# Altium PCB serdes-interface.PcbDoc (part 2 of 3)
Units mm, origin at the board's own origin, x right, y up, seen from the top; angles counter-clockwise.
Board outline 39.62 x 39.62 mm, 6 copper layers (Top Layer, GND1, MidLayer1, VDD_negative, GND2, Bottom Layer); 177 components, 131 nets, 827 pads, 502 vias.
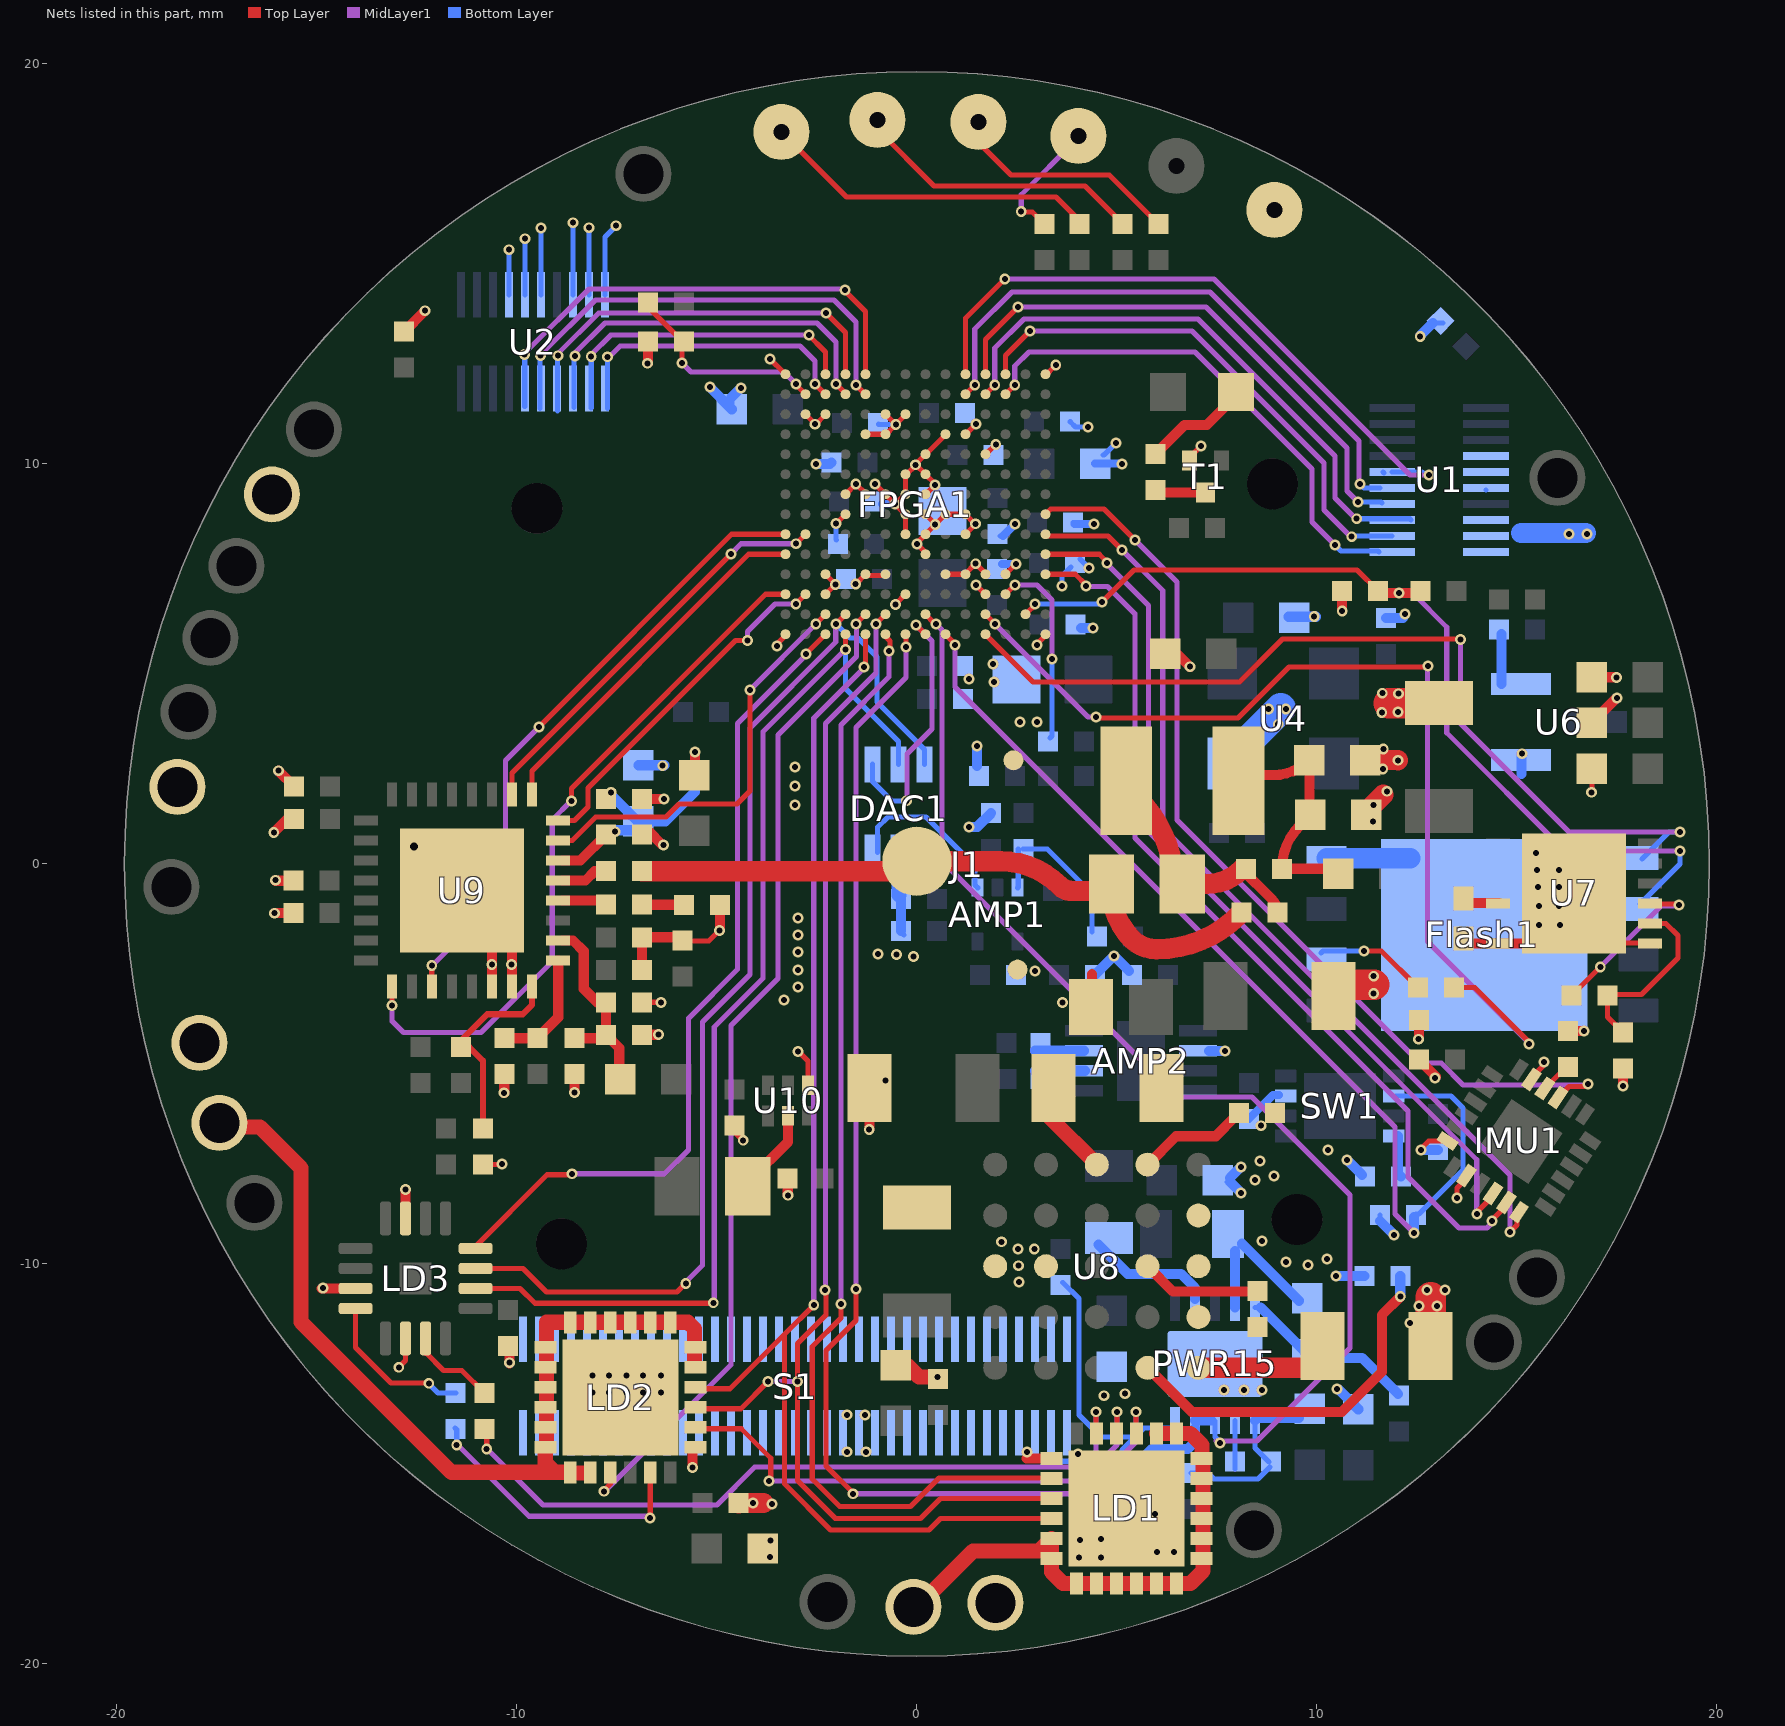
[diagram p6: the nets of this part, all layers, seen from the top]

## Via types
v1: diameter 0.27, hole 0.15, Top Layer to Bottom Layer, tented both sides, 501 vias
v2: diameter 0.5, hole 0.2, Top Layer to Bottom Layer, tented both sides, 1 vias

## Nets (pads, with @x,y where several pads share a name; then routed paths per layer and width w, separated by ;. In a path a pad name is that pad's centre, name@x,y a point inside that pad or via, vN(x,y) a via of type N, cw(c..) or ccw(c..) an arc to the next point about the centre after c; other vN are vias at no path point) (continued)
GND: AMP2.6 C1.1 C2.1 C3.1 C4.1 C5.1 C6.1 C7.1 C8.1 C9.1 C10.1 C11.1 C12.1 C13.1 C14.1 C15.1 C16.1 C17.1 C20.1 C21.1 C22.1 C23.1 C24.1 C25.1 C26.1 C27.1 C28.1 C29.1 C30.1 C31.1 C32.1 C33.1 C34.1 C35.1 C36.1 C37.1 C38.1 C39.1 C40.1 C41.1 C42.1 C43.1 C44.1 C45.2 C46.2 C47.2 C48.2 C50.1 C51.1 C52.1 C53.1 C54.1 C55.1 C56.1 C57.1 C58.1 C59.1 C60.1 C61.1 C62.1 C63.1 C64.1 C66.2 C67.2 C68.2 C70.2 C71.2 C72.2 C73.2 C75.2 C76.2 C77.1 C78.1 DAC1.5 Flash1.4 FPGA1.A1 FPGA1.A14 FPGA1.C2 FPGA1.C3 FPGA1.C6 FPGA1.C7 FPGA1.D5 FPGA1.D6 FPGA1.D9 FPGA1.D10 FPGA1.E8 FPGA1.E11 FPGA1.F7 FPGA1.F8 FPGA1.G4 FPGA1.G5 FPGA1.G6 FPGA1.G7 FPGA1.G8 FPGA1.H4 FPGA1.H7 FPGA1.H8 FPGA1.H9 FPGA1.H10 FPGA1.J7 FPGA1.J8 FPGA1.J10 FPGA1.K8 FPGA1.L3 FPGA1.L5 FPGA1.L6 FPGA1.L9 FPGA1.L10 FPGA1.L11 FPGA1.L12 FPGA1.M3 FPGA1.M7 FPGA1.M11 FPGA1.P1 FPGA1.P14 IMU1.11 IMU1.18 IMU1.20 J1.1 LD1.1 LD1.PAD LD2.1 LD2.PAD LD3.7 LD3.11 LD3.14 PWR15.PAD R3.2 R6.1 R12.1 R17.1 R21.1 R28.2 R30.2 R31.2 R32.2 R36.1 R39.1 R45.2 R46.1 S1.1 S1.2 S1.3 S1.4 S1.5 S1.6 S1.7 S1.8 S1.9 S1.10 S1.11 S1.12 S1.13 S1.14 S1.15 S1.16 S1.17 S1.18 S1.19 S1.20 S1.21 S1.22 S1.23 S1.24 S1.25 S1.26 S1.27 S1.28 S1.29 S1.30 S1.31 S1.32 S1.33 S1.34 S1.35 S1.36 S1.37 S1.38 S1.39 S1.40 S1.41 S1.42 S1.43 S1.44 S1.45 S1.46 S1.47 S1.48 S1.49 S1.50 S1.51 S1.52 S1.53 S1.54 S1.55 S1.56 S1.57 S1.58 S1.59 S1.60 S1.61 S1.62 S1.63 S1.64 S1.65 S1.66 S1.67 S1.68 S1.69 S1.70 SW1.3 T1.2 T_GND1.0 T_GND2.0 T_GND3.0 T_GND4.0 U1.1 U1.2 U1.3 U1.5 U1.6 U1.7 U2.1 U2.2 U2.3 U2.5 U2.6 U2.7 U4.2 U6.1 U7.6 U7.7 U7.13 U8.B5 U8.C1 U8.C2 U8.C5 U8.D5 U9.6 U9.7 U9.33 U10.4 | length 92.9
  Top Layer w0.13: C14.1@-15.743,1.122 C14.1@-15.57,1.122 ; C6.1@-15.587,-0.419 C6.1@-15.583,-0.415 ; v1@-14.884,-10.617 v1@-14.88,-10.613 ; v1@-13.005,-12.636 -12.785,-12.417 LD3.14@-12.785,-11.863 ; R6.1@-10.854,-7.511 v1@-10.356,-7.511 ; U9.33@-10.625,-1.837 U9.33@-10.49,-1.702 ; U9.33@-10.147,-1.943 U9.33@-10.125,-1.965 ; C8.1@-6.872,-3.459 v1@-6.393,-3.459 ; v1@-6.363,0.47 v1(-6.337,0.47) ; C12.1@-5.779,-1.93 -5.207,-1.93 v1@-4.922,-1.645 ; C4.1@-4.716,-6.558 v1@-4.369,-6.905 ; v1@-3.7,12.65 -3.697,12.65 FPGA1.A1@-3.288,12.242 ; v1@-3.5,5.5 -3.288,5.712 FPGA1.P1@-3.288,5.742 ; v1@-2.997,-4.648 -2.721,-4.924 U10.4@-2.721,-5.529 ; FPGA1.C2@-2.788,11.242 -2.554,11.007 v1@-2.535,11.007 ; v1(-2.548,10.992) -2.535,10.992 -2.532,10.989 -2.291,11.23 FPGA1.C3@-2.291,11.25 ; FPGA1.M3@-2.288,6.742 v1@-2.038,6.992 ; FPGA1.L3@-2.288,7.242 v1@-2.038,6.992 ; v1@-2.032,8.486 -2.032,8.498 v1@-2.022,8.507 ; v1@-2.023,7.011 -2.023,7.007 v1@-2.038,6.992 ; v1@-2.009,6.978 -2.024,6.978 v1@-2.038,6.992 ; v1@-2,8.525 -2.005,8.525 FPGA1.H4@-1.788,8.742 ; FPGA1.G4@-1.788,9.229 -1.788,9.239 v1(-1.53,9.497) FPGA1.G5@-1.278,9.245 ; v1@-1.572,6.989 -1.541,6.989 FPGA1.L5@-1.288,7.242 -1.258,7.212 -0.783,7.212 FPGA1.L6@-0.778,7.207 ; FPGA1.D5@-1.288,10.742 FPGA1.D6@-0.788,10.742 ; v1(-1.194,-6.642) v1@-1.185,-6.633 ; v1(-1.05,9.5) -0.8,9.25 FPGA1.G6@-0.775,9.25 ; FPGA1.D6@-0.824,10.71 -0.803,10.71 v1@-0.532,10.981 ; C54.1@-0.8,-5.423 v1(-0.787,-5.41) ; FPGA1.C6@-0.788,11.242 -0.532,10.985 v1@-0.532,10.981 ; FPGA1.G6@-0.786,9.239 v1@-0.552,9.005 ; v1(-0.54,6.485) -0.54,6.493 FPGA1.M7@-0.273,6.761 ; v1@-0.532,10.951 v1@-0.532,10.981 ; C43.1@-0.526,-12.529 C43.1@-0.247,-12.529 ; v1@-0.518,10.928 -0.518,10.972 -0.53,10.983 v1(-0.529,10.984) -0.273,11.24 FPGA1.C7@-0.273,11.255 ; FPGA1.G7@-0.307,9.241 v1(-0.55,8.998) -0.276,8.724 -0.288,8.712 FPGA1.J7@-0.288,8.242 ; FPGA1.G7@-0.275,9.275 -0.288,9.288 FPGA1.F7@-0.288,9.742 -0.258,9.742 v1@-0.038,9.962 ; v1@-0.055,9.975 FPGA1.E8@0.212,10.242 ; v1@-0.025,9.975 FPGA1.F8@0.212,9.742 0.215,9.735 FPGA1.F8@0.217,9.736 ; FPGA1.G8@0.175,9.25 0.225,9.25 v1(0.45,9.475) 0.45,9.503 FPGA1.F8@0.217,9.736 ; FPGA1.H8@0.212,8.741 0.463,8.49 0.714,8.741 FPGA1.H9@0.726,8.741 ; FPGA1.G8@0.212,9.242 0.212,9.238 FPGA1.G8@0.225,9.225 ; FPGA1.F8@0.212,9.742 FPGA1.F8@0.217,9.736 ; FPGA1.G8@0.22,9.19 FPGA1.G8@0.22,9.22 ; FPGA1.K8@0.225,7.75 0.225,7.775 v1(0,8) 0,8.025 FPGA1.J8@0.212,8.237 ; FPGA1.J8@0.225,8.25 FPGA1.J8@0.212,8.237 ; FPGA1.J8@0.245,8.22 0.212,8.22 FPGA1.J8@0.212,8.237 ; FPGA1.E8@0.257,10.273 0.714,10.73 FPGA1.D9@0.714,10.751 ; v1@0.453,8.473 0.443,8.473 FPGA1.J8@0.212,8.242 FPGA1.J8@0.212,8.237 ; FPGA1.L9@0.712,7.242 1.185,7.242 FPGA1.L10@1.206,7.22 ; FPGA1.H9@0.712,8.742 1.158,8.742 FPGA1.H10@1.2,8.7 ; FPGA1.D10@1.2,10.75 1.225,10.75 v1(1.475,11) ; FPGA1.L10@1.212,7.242 1.212,7.253 1.467,7.508 1.726,7.249 FPGA1.L11@1.732,7.249 ; FPGA1.L10@1.211,7.251 FPGA1.L10@1.211,7.272 ; FPGA1.J10@1.212,8.242 1.445,8.475 v1@1.45,8.475 ; FPGA1.H10@1.212,8.742 v1@1.428,8.525 ; v1(1.475,6.975) 1.7,6.75 FPGA1.M11@1.725,6.75 ; FPGA1.E11@1.727,10.245 1.73,10.245 v1(1.971,10.486) ; FPGA1.L12@2.212,7.242 2.475,7.505 v1@2.475,7.525 ; 2.725,-14.875 2.738,-14.862 ; v1@3,5.525 3.025,5.525 3.212,5.712 FPGA1.P14@3.212,5.742 ; FPGA1.A14@3.237,12.236 3.429,12.428 3.525,12.428 3.482,12.471 v1(3.47,12.471) ; LD1.1@3.331,-14.831 LD1.1@3.349,-14.849 ; C50.1@4.508,-3.746 C50.1@4.508,-3.594 ; C21.1@6.204,5.253 C21.1@6.497,5.253 ; C53.1@6.401,-5.626 C53.1@6.426,-5.601 ; T1.2@6.814,10.084 6.814,10.164 v1(7.1,10.45) ; C1.1@11.233,1.224 cw(c11.419,1.224) C1.1@11.287,1.356 ; v1@12.535,-4.369 v1@12.549,-4.355 ; v1@12.6,-7.125 12.796,-6.929 IMU1.18@13.268,-6.929 ; v1@13.5,-8.4 13.5,-8.1 13.742,-7.858 IMU1.20@13.742,-7.791 ; C57.1@13.665,-2.07 C57.1@13.749,-1.987 ; U7.13@15.245,-1.987 U7.13@15.329,-2.07 ; IMU1.11@15.4,-5.3 15.675,-5.025 v1(15.675,-4.95) ; v1@16.872,1.784 C60.1@16.872,2.383 ; U7.13@17.45,-1.994 17.47,-1.974 U7.7@18.347,-1.974
  Top Layer w0.254: v1(-16.078,0.787) C14.1@-15.743,1.122 ; v1@-16.048,-1.227 C5.1@-15.583,-1.227 ; v1(-16.04,-0.406) -16.04,-0.419 C6.1@-15.587,-0.419 ; v1(-15.964,2.329) C13.1@-15.57,1.935 ; v1@-14.88,-10.613 LD3.11@-14.035,-10.613 ; C40.1@-12.821,13.305 v1@-12.301,13.825 ; LD3.7@-12.785,-8.978 v1@-12.785,-8.208 ; U9.33@-11.197,-0.831 U9.33@-10.408,-1.619 ; U9.6@-10.625,-3.063 U9.33@-10.625,-1.837 ; v1@-10.317,-5.72 C20.1@-10.317,-5.258 ; v1@-10.189,-12.493 C45.2@-10.189,-12.051 ; U9.7@-10.125,-3.063 U9.33@-10.125,-1.965 ; v1@-8.564,-5.678 C9.1@-8.564,-5.258 ; C7.1@-6.872,-4.272 v1@-6.507,-4.272 ; C10.1@-6.872,-2.646 C11.1@-6.872,-1.833 C12.1@-6.096,-1.833 ; C15.1@-6.872,1.621 v1@-6.367,1.621 ; v1@-6.725,12.52 R12.1@-6.725,13.058 ; C16.1@-6.718,0.826 v1@-6.363,0.47 ; v1(-5.613,-15.088) LD2.1@-5.613,-14.63 ; v1@-4.922,-1.645 R3.2@-4.922,-1.033 ; v1@-3.232,-8.268 C3.1@-3.232,-7.806 ; v1@-1.185,-6.633 C54.1@-1.185,-5.601 ; 2.738,-14.862 LD1.1@3.361,-14.862 ; C50.1@4.375,-2.927 4.375,-2.75 ; C21.1@6.497,5.253 v1@6.825,4.925 ; v1@10.625,6.343 R17.1@10.625,6.917 ; C46.2@12.549,-4.894 v1@12.977,-5.323 ; v1@12.549,-4.355 C47.2@12.549,-3.904 ; C57.1@13.749,-1.987 U7.6@14.521,-1.987 U7.13@15.245,-1.987 ; C48.2@16.277,-4.18 v1(16.674,-4.18) ; C58.1@16.872,3.526 v1@17.498,4.152 ; C59.1@16.872,4.669 v1@17.483,4.669 ; v1@17.648,-5.529 R28.2@17.648,-5.111
  Top Layer w0.381: C43.1@-0.247,-12.529 0.051,-12.827 C44.1@0.521,-12.827
  Top Layer w0.508: C42.1@-4.458,-15.981 -4.452,-15.975 -3.837,-15.975 ; C2.1@11.207,2.596 12.022,2.596 v1(12.027,2.591) ; C1.1@11.287,1.356 v1@11.659,1.727
  Top Layer w0.762: C51.1@10.481,-3.023 11.43,-3.023 ; 11.789,4.017 C56.1@13.056,4.017 ; C52.1@12.843,-12.212 12.843,-10.827
  Bottom Layer w0.13: U2.7@-10.201,14.226 v1@-10.201,15.351 ; U2.6@-9.801,14.226 v1@-9.801,15.626 ; U2.5@-9.401,14.226 v1(-9.4,15.9) ; U2.3@-8.601,14.226 v1@-8.601,16.051 ; U2.2@-8.201,14.226 v1@-8.201,15.899 ; U2.1@-7.801,14.226 -7.801,15.674 v1@-7.525,15.95 ; C29.1@-4.629,11.368 C29.1@-4.629,11.671 ; v1(-2.025,8.509) -2.025,8.113 C26.1@-2.01,8.099 ; C23.1@-0.961,10.992 -0.953,10.984 v1(-0.529,10.984) ; C31.1@-0.873,9.002 C31.1@-0.869,8.998 ; C71.2@-0.395,-1.671 -0.395,-1.705 C71.2@-0.325,-1.775 ; R21.1@1.475,2.425 1.5,2.45 ; C64.1@2.075,8.2 C64.1@2.15,8.2 ; 3.625,-14.925 3.633,-14.933 R39.1@4.675,-14.933 ; v1(3.625,6.95) 3.625,7.2 C30.1@3.85,7.425 ; C33.1@3.83,11.055 3.96,10.925 v1@4.25,10.925 ; C35.1@3.907,8.531 C35.1@3.937,8.5 ; C30.1@4.075,7.625 v1(4.3,7.4) ; C75.2@4.375,-2.675 C75.2@4.445,-2.675 ; C34.1@4.65,10.225 4.675,10.225 v1(4.975,10.525) ; v1@4.997,10.55 v1@5,10.55 ; C76.2@5.3,-2.675 C76.2@5.325,-2.675 ; R36.1@5.525,-15.9 R36.1@5.6,-15.9 ; AMP2.6@7.275,-4.7 AMP2.6@7.3,-4.675 ; C68.2@7.75,-7.95 C68.2@7.825,-7.95 ; U4.2@7.887,2.509 U4.2@7.887,2.68 ; C78.1@8.304,-6.38 C78.1@8.304,-6.371 ; v1@9.977,6.18 v1@9.982,6.185 ; R46.1@11.575,-8.925 R46.1@11.575,-8.783 ; v1@12.151,6.147 v1@12.217,6.213 ; Flash1.4@12.33,0.145 Flash1.4@12.375,0.1 ; C39.1@12.898,13.523 C39.1@13.142,13.523
  Bottom Layer w0.203: C31.1@-0.869,8.998 v1(-0.55,8.998) ; C22.1@2.125,7.5 v1(2.475,7.5) ; C64.1@2.15,8.2 v1(2.45,8.5) ; C35.1@3.937,8.5 v1@4.4,8.5 ; C34.1@4.454,10.007 v1@5.143,10.007 ; v1@4.974,10.526 v1@4.997,10.55 ; C78.1@8.304,-6.371 8.9,-5.775 SW1.3@9.05,-5.775
  Bottom Layer w0.254: C17.1@-6.964,2.465 v1@-6.317,2.465 ; v1@-5.175,11.914 C29.1@-4.629,11.368 ; C29.1@-4.629,11.671 v1(-4.4,11.9) ; v1@-2.5,10 -2.173,10 C28.1@-2.133,10.039 ; C71.2@-0.395,-1.671 C70.2@-0.395,-0.871 ; v1(1.3,0.925) 1.508,0.925 C73.2@1.854,1.27 ; 1.5,2.45 v1(1.5,2.95) ; C36.1@4.1,5.9 v1(4.4,5.9) ; C75.2@4.445,-2.779 v1(4.925,-2.3) ; v1(4.925,-2.3) C76.2@5.3,-2.675 ; R36.1@5.6,-15.9 v1(5.95,-16.25) ; AMP2.6@7.3,-4.675 v1(7.7,-4.675) ; C68.2@7.825,-7.95 v1(8.1,-8.225) ; C68.2@7.825,-7.85 v1(8.1,-7.575) ; C37.1@9.29,6.18 v1@9.977,6.18 ; v1(10.473,-10.304) R32.2@11.183,-10.304 ; v1@10.525,-13.125 C66.2@11.032,-13.632 ; v1(10.75,-7.4) R45.2@11.125,-7.775 ; R46.1@11.575,-8.925 v1(11.925,-9.275) ; C38.1@11.73,6.147 v1@12.151,6.147 ; v1@12.575,13.2 C39.1@12.898,13.523 ; v1@12.625,-7.155 C77.1@13.029,-7.155 ; 15.115,2.25 U6.1@15.115,2.741
  Bottom Layer w0.381: C70.2@-0.45,-0.775 DAC1.5@-0.45,0.29
  Bottom Layer w0.508: Flash1.4@10.237,0.145 Flash1.4@12.33,0.145 ; 15.1,8.275 v1@16.725,8.275
  Bottom Layer w0.762: U4.2@7.887,2.68 v1@9.093,3.886
  other v1: 4.053,-17.346 4.603,-17.346 -3.67,-17.323 6,-17.2 6.425,-17.2 -3.658,-16.916 4.075,-16.9 4.6,-16.875 -3.625,-16 -4.1,-15.975 4.025,-14.75 -1.75,-14.698 -1.275,-14.698 2.75,-14.7 -1.75,-13.773 -1.3,-13.775 4.678,-13.296 5.203,-13.246 -8.115,-13.221 -7.696,-13.221 -7.264,-13.221 -6.845,-13.221 -6.401,-13.221 7.675,-13.15 8.175,-13.15 8.625,-13.15 10.5,-13.125 0.513,-12.827 -8.115,-12.789 -7.696,-12.789 -7.264,-12.789 -6.845,-12.789 -6.401,-12.789 -12.954,-12.586 -10.185,-12.471 12.325,-11.475 12.55,-11.05 13,-11.05 12.75,-10.65 13.2,-10.65 -14.846,-10.604 2.553,-10.452 2.54,-10.046 9.775,-10.025 9.225,-9.95 10.25,-9.875 2.527,-9.627 2.934,-9.627 2.11,-9.447 8.625,-9.425 13.5,-8.35 -3.225,-8.284 -12.789,-8.141 8.45,-7.9 8.925,-7.8 -10.376,-7.506 8.575,-7.425 10.275,-7.15 12.6,-7.15 -4.343,-6.909 8.603,-6.546 -10.321,-5.722 -8.559,-5.714 17.65,-5.55 12.95,-5.35 -2.972,-4.686 12.535,-4.381 -6.464,-4.267 3.64,-3.468 -6.401,-3.467 -3.325,-3.4 11.417,-3.238 -2.975,-3.075 11.417,-2.807 2.95,-2.675 -2.975,-2.65 -10.63,-2.515 -10.135,-2.515 -0.085,-2.318 -0.975,-2.25 -0.51,-2.268 -2.975,-2.2 -2.975,-1.775 -4.94,-1.664 15.55,-1.525 16.075,-1.525 -2.975,-1.35 -16.066,-1.232 15.55,-1.05 16.05,-1.05 15.525,-0.575 16.05,-0.575 15.5,-0.15 16.05,-0.15 15.475,0.275 11.405,1.054 -3.05,1.475 11.417,1.473 -6.322,1.623 16.866,1.791 11.747,1.816 -3.05,1.95 11.646,2.375 -3.05,2.425 -6.356,2.456 15.126,2.756 11.659,2.87 9.03,3.492 2.575,3.55 3,3.55 11.62,3.785 12.027,3.797 8.788,3.873 9.22,3.873 17.5,4.15 11.633,4.267 12.04,4.255 1.925,4.55 1.3,4.625 17.488,4.661 6.828,4.929 1.9,5 -3.5,5.45 3,5.475 9.931,6.185 12.201,6.249 10.63,6.325 -2.041,6.983 -1.532,6.997 1.468,7.505 16.3,8.25 16.75,8.25 0.456,8.482 1.465,8.502 4.425,8.5 -0.035,9.977 -2.525,10 5.125,10 4.275,10.925 -5.175,11.925 -6.734,12.515 -3.675,12.625 12.581,13.187 -12.297,13.829 -10.197,15.354 -9.797,15.629 -8.197,15.904 -7.522,15.954 -8.597,16.029
  other v2: -12.573,0.432
GPO0: FPGA1.N3 U9.15 | length 10.5
  Top Layer w0.13: U9.15@-8.975,0.587 -8.616,0.587 -8.029,1.175 -6.275,1.175 -5.95,1.5 -4.5,1.5 -4.175,1.825 v1(-4.175,4.35) ; v1@-2.525,6.005 FPGA1.N3@-2.288,6.242
  MidLayer1 w0.13: v1(-4.175,4.35) v1@-2.53,5.995
  Bottom Layer w0.13: v1@-2.53,5.995 v1(-2.53,6)
GPO1: FPGA1.M2 U9.16 | length 9
  Top Layer w0.13: U9.16@-8.975,1.087 -8.563,1.087 -8.225,1.425 -8.225,1.9 -4.538,5.587 v1(-4.237,5.587) ; v1@-3.075,6.5 v1(-3.03,6.5) FPGA1.M2@-2.788,6.742
  MidLayer1 w0.13: v1(-4.237,5.587) -4.237,5.813 -3.55,6.5 v1(-3.03,6.5)
GPO2: FPGA1.K1 U9.17 | length 9.2
  Top Layer w0.13: U9.17@-9.625,1.737 -9.625,2.325 -4.208,7.742 FPGA1.K1@-3.288,7.742
GPO3: FPGA1.J2 U9.18 | length 10.3
  Top Layer w0.13: U9.18@-10.125,1.737 -10.125,2.275 v1(-4.65,7.75) ; v1(-3.025,8.005) FPGA1.J2@-2.788,8.242
  MidLayer1 w0.13: v1(-4.65,7.75) -4.395,8.005 v1(-3.025,8.005)
HS: FPGA1.M1 U9.1 | length 17.6
  Top Layer w0.13: v1(-13.125,-3.537) U9.1@-13.125,-3.063 ; v1(-8.636,1.575) -8.636,1.889 -3.783,6.742 FPGA1.M1@-3.288,6.742
  MidLayer1 w0.13: v1(-13.125,-3.537) -13.125,-3.931 -12.84,-4.216 -10.897,-4.216 -9.119,-2.438 -9.119,1.105 v1@-8.649,1.575
  Bottom Layer w0.13: v1@-8.649,1.575 v1(-8.636,1.575)
IMU_SPI0: FPGA1.K14 IMU1.22 | length 22.2
  Top Layer w0.13: FPGA1.K14@3.212,7.742 4.558,7.742 v1@4.763,7.538 ; v1(14,-8.75) 14,-8.7 IMU1.22@14.3,-8.4
  MidLayer1 w0.13: v1@4.75,7.5 5.791,6.459 5.791,0.809 13.995,-7.395 v1@13.995,-8.75
  Bottom Layer w0.13: v1@4.75,7.5 v1(4.75,7.525)
IMU_SPI1: FPGA1.L14 IMU1.23 | length 22.8
  Top Layer w0.13: FPGA1.L14@3.212,7.242 3.958,7.242 4.225,6.975 v1(4.225,6.95) ; v1(14.375,-8.925) 14.375,-8.9 IMU1.23@14.675,-8.6
  MidLayer1 w0.13: v1@4.188,6.938 4.763,6.938 5.448,6.252 5.448,0.652 12.275,-6.175 12.275,-7.825 13.55,-9.1 14.25,-9.1 14.375,-8.975 v1(14.375,-8.925)
IMU_SPI2: FPGA1.J14 IMU1.24 | length 23.7
  Top Layer w0.13: FPGA1.J14@3.212,8.242 3.253,8.2 4.775,8.2 v1(5.125,7.85) v1@5.1,7.825 ; v1(14.825,-9.2) 15,-9.025 IMU1.24@15,-8.775
  MidLayer1 w0.13: v1@5.138,7.838 6.147,6.828 6.147,0.903 14.825,-7.775 v1(14.825,-9.2) v1@14.8,-9.225
IMU_SPI3: FPGA1.H14 IMU1.9 | length 23.8
  Top Layer w0.13: FPGA1.H14@3.212,8.742 3.345,8.875 4.675,8.875 v1@5.362,8.187 ; IMU1.9@16.027,-5.835 16.3,-5.562 16.688,-5.562 v1@16.7,-5.55
  MidLayer1 w0.13: v1(5.45,8.1) 6.502,7.048 6.502,1.098 12.578,-4.978 13.106,-4.978 13.653,-5.525 v1@16.75,-5.525
  Bottom Layer w0.13: v1@5.425,8.1 5.425,8.125 v1(5.45,8.1)
  other v1: 16.775,-5.5
J_TCK: R27.1 T_TCK1.0 | length 8.4
  Top Layer w0.13: T_TCK1.0@-3.39,18.3 -1.765,16.675 3.475,16.675 R27.1@4.1,16.05
J_TDI: R26.1 T_TDI1.0 | length 3.1
  Top Layer w0.13: v1@2.606,16.3 2.883,16.3 R26.1@3.183,16
  MidLayer1 w0.13: v1(2.606,16.312) 2.606,16.73 T_TDI1.0@3.975,18.1
J_TDO: R25.1 T_TDO1.0 | length 5.5
  Top Layer w0.13: T_TDO1.0@1.575,18.175 1.575,18 2.35,17.225 4.808,17.225 R25.1@6.033,16
J_TMS: R24.1 T_TMS1.0 | length 7.5
  Top Layer w0.13: T_TMS1.0@-0.99,18.6 -0.99,18.365 0.425,16.95 4.2,16.95 R24.1@5.225,15.925
L\E\D\0\_\A\C\T\I\V\E\: FPGA1.P7 LD1.21 | length 31.4
  Top Layer w0.13: v1@-1.632,-15.691 -2.273,-15.05 -2.273,-12.167 -1.525,-11.418 v1(-1.525,-10.625) ; FPGA1.P7@-0.288,5.742 -0.276,5.73 v1@-0.276,5.45 ; LD1.21@5.475,-14.225 v1(5.475,-13.698)
  MidLayer1 w0.13: v1(-1.6,-15.748) 4.177,-15.748 5.475,-14.45 v1@5.475,-13.7 ; v1(-1.525,-10.625) -1.525,3.41 -0.275,4.66 v1(-0.275,5.425)
L\E\D\1\_\A\C\T\I\V\E\: FPGA1.N5 LD2.21 | length 25.2
  Top Layer w0.13: v1@-7.81,-15.646 -7.668,-15.503 LD2.21@-7.668,-15.21 ; v1@-1.527,6.002 FPGA1.N5@-1.288,6.242
  MidLayer1 w0.13: v1@-7.825,-15.7 -4.648,-12.523 -4.648,-4.038 -3.475,-2.865 -3.475,3.225 -1.512,5.188 v1@-1.512,5.987
  Bottom Layer w0.13: v1(-1.525,6) v1@-1.512,5.987
  other v1: -7.823,-15.684
LED0: FPGA1.P6 LD1.2 | length 28.5
  Top Layer w0.13: v1(-1.9,-11) -1.9,-11.35 -2.616,-12.066 -2.616,-15.38 -1.93,-16.066 -0.165,-16.066 0.55,-15.35 LD1.2@3.35,-15.35 ; FPGA1.P6@-0.788,5.742 -0.788,5.688 -0.675,5.575 v1@-0.675,5.316 ; v1(-0.697,5.323) v1@-0.675,5.345
  MidLayer1 w0.13: v1@-1.94,-10.96 -1.9,-10.919 -1.9,3.475 -0.697,4.678 v1(-0.697,5.323)
LED1: FPGA1.P5 LD1.4 LD2.4 | length 32.1
  Top Layer w0.13: LD2.4@-5.543,-13.085 -5.505,-13.123 -4.678,-13.123 -3.315,-11.76 ; v1(-2.578,-11.024) -3.315,-11.76 ; FPGA1.P5@-1.288,5.742 -1.288,4.913 v1@-1.275,4.9 ; LD1.4@3.361,-16.362 0.588,-16.362 0.3,-16.65 -2.159,-16.65 -3.315,-15.494 -3.315,-11.76
  MidLayer1 w0.13: v1(-2.578,-11.024) -2.578,3.647 v1@-1.325,4.9
  other v1: -1.325,4.925
LED2: FPGA1.N6 LD1.3 LD2.3 | length 32.2
  Top Layer w0.13: LD2.3@-5.543,-13.585 -5.505,-13.623 -4.403,-13.623 v1(-3.721,-12.941) ; v1@-2.275,-10.762 -2.275,-11.279 -2.984,-11.989 v1(-2.984,-12.941) -2.984,-15.418 -2.041,-16.362 0.088,-16.362 0.588,-15.862 LD1.3@3.361,-15.862 ; v1@-1.025,6.005 FPGA1.N6@-0.788,6.242
  MidLayer1 w0.13: v1(-3.721,-12.941) v1(-2.984,-12.941) ; v1@-2.286,-10.564 -2.286,3.514 -1.028,4.772 v1@-1.028,5.928
  Bottom Layer w0.13: v1@-1.1,6 v1@-1.028,5.928
  other v1: -2.3,-10.65 -1.025,6
LED22-2: LD1.22 LD2.2 | length 13.2
  Top Layer w0.13: LD2.2@-5.543,-14.085 -5.505,-14.123 -4.395,-14.123 -3.658,-14.86 -3.658,-15.392 v1(-3.696,-15.43) ; v1(5,-13.698) 5,-14.15 LD1.22@5.025,-14.175
  MidLayer1 w0.13: v1(-3.696,-15.43) 4.095,-15.43 5,-14.525 v1@5,-13.7
  Bottom Layer w0.13: v1@5,-13.698 v1@5,-13.675
LED_SPI2: FPGA1.P3 LD3.4 | length 20.6
  Top Layer w0.13: LD3.4@-11.062,-9.588 -9.246,-7.772 v1@-8.649,-7.772 ; v1@-2.7,5.33 FPGA1.P3@-2.288,5.742
  MidLayer1 w0.13: v1@-8.636,-7.747 -6.312,-7.747 -5.715,-7.15 -5.715,-3.861 -4.486,-2.632 -4.486,3.514 v1@-2.762,5.238
  Bottom Layer w0.13: v1@-8.661,-7.722 v1@-8.636,-7.747
  other v1: -8.623,-7.747 -2.775,5.25
LEDA: LD1.5 LD1.6 LD1.7 LD1.8 LD1.9 LD1.10 LD1.11 LD1.12 LD1.13 LD1.14 LD1.15 LD1.16 LD1.17 LD1.18 LD1.19 LD1.20 T_LEDA.0 | length 13.6
  Top Layer w0.13: T_LEDA.0@-0.108,-18.662 T_LEDA.0@-0.104,-18.666 ; LD1.18@7.125,-14.925 LD1.18@7.153,-14.953
  Top Layer w0.381: T_LEDA.0@-0.125,-18.7 1.4,-17.175 3.048,-17.175 LD1.5@3.361,-16.862 LD1.6@3.361,-17.362 3.361,-17.705 3.648,-17.991 LD1.7@4.105,-17.991 ; LD1.7@3.986,-17.987 LD1.8@4.486,-17.987 LD1.9@4.986,-17.987 LD1.10@5.486,-17.987 LD1.11@5.986,-17.987 LD1.12@6.463,-17.987 ; LD1.20@5.986,-14.237 LD1.19@6.486,-14.237 6.84,-14.237 7.128,-14.524 LD1.18@7.128,-14.88 ; LD1.12@6.486,-17.987 6.84,-17.987 7.153,-17.674 LD1.18@7.153,-14.953
LEDC: LD2.5 LD2.6 LD2.7 LD2.8 LD2.9 LD2.10 LD2.11 LD2.12 LD2.13 LD2.14 LD2.15 LD2.16 LD2.17 LD2.18 LD2.19 LD2.20 T_LEDC.0 | length 23.1
  Top Layer w0.381: T_LEDC.0@-17.25,-6.575 -16.425,-6.575 -15.4,-7.6 -15.4,-11.45 -11.64,-15.21 -9.047,-15.21 ; LD2.18@-9.293,-14.585 -9.293,-14.964 -9.047,-15.21 ; LD2.18@-9.263,-14.44 -9.263,-11.46 LD2.12@-8.668,-11.46 LD2.11@-8.168,-11.46 LD2.10@-7.668,-11.46 LD2.9@-7.168,-11.46 LD2.8@-6.668,-11.46 LD2.7@-6.248,-11.46 ; LD2.19@-8.668,-15.227 LD2.20@-8.255,-15.227 ; LD2.19@-8.668,-15.21 -9.047,-15.21 ; LD2.7@-6.168,-11.46 -5.723,-11.46 -5.563,-11.62 LD2.5@-5.563,-12.522
MISO_A1+: FPGA1.B11 U1.18 | length 14.6
  Top Layer w0.13: FPGA1.B11@1.712,11.742 v1(1.945,11.975)
  MidLayer1 w0.13: v1(1.945,11.975) 1.945,12.895 2.675,13.625 7.025,13.625 10.45,10.2 10.45,9.15 v1@10.975,8.625
  Bottom Layer w0.13: v1(10.993,8.63) 12.32,8.63 U1.18@12.35,8.6
MISO_A1-: FPGA1.A11 U1.17 | length 13.7
  Top Layer w0.13: FPGA1.A11@1.712,12.242 1.712,13.112 v1(2.525,13.925)
  MidLayer1 w0.13: v1(2.525,13.925) 7.225,13.925 10.75,10.4 10.75,9.325 v1@10.938,9.138
  Bottom Layer w0.13: v1(11.025,9.05) 11.6,9.05 U1.17@11.625,9.025
MISO_A2+: FPGA1.B12 U1.20 | length 12.9
  Top Layer w0.13: FPGA1.B12@2.212,11.742 v1(2.445,11.975)
  MidLayer1 w0.13: v1(2.445,11.975) 2.445,12.445 2.8,12.8 6.95,12.8 9.875,9.875 9.875,8.55 v1@10.438,7.987
  Bottom Layer w0.13: v1(10.45,7.975) 10.448,7.975 10.598,7.825 11.525,7.825 U1.20@11.55,7.8
MISO_A2-: FPGA1.A12 U1.19 | length 13.2
  Top Layer w0.13: FPGA1.A12@2.212,12.242 2.212,12.712 v1(2.825,13.325)
  MidLayer1 w0.13: v1(2.825,13.325) 6.875,13.325 10.175,10.025 10.175,8.85 v1@10.85,8.175
  Bottom Layer w0.13: v1@10.868,8.201 U1.19@11.873,8.201
  other v1: 10.868,8.18
MISO_B1+: FPGA1.B4 U2.18 | length 9.8
  Top Layer w0.13: v1(-2.025,12) -1.775,11.75 FPGA1.B4@-1.75,11.75
  MidLayer1 w0.13: v1@-8.582,12.694 -8.582,12.744 -7.801,13.525 -2.5,13.525 -2.025,13.05 v1(-2.025,12)
  Bottom Layer w0.13: U2.18@-8.573,11.414 v1@-8.573,12.703
  other v1: -8.553,12.699
MISO_B1-: FPGA1.A4 U2.17 | length 10.1
  Top Layer w0.13: v1@-2.25,13.75 -1.788,13.288 FPGA1.A4@-1.788,12.242
  MidLayer1 w0.13: v1@-8.991,12.741 -7.957,13.775 v1(-2.275,13.775)
  Bottom Layer w0.13: U2.17@-8.985,11.324 v1@-8.985,12.613
  other v1: -8.972,12.705
MISO_B2+: FPGA1.B3 U2.20 | length 7.7
  Top Layer w0.13: v1(-2.55,12) -2.325,11.775 FPGA1.B3@-2.275,11.775
  MidLayer1 w0.13: v1@-7.714,12.656 -7.42,12.95 -2.925,12.95 -2.55,12.575 v1(-2.55,12)
  Bottom Layer w0.13: U2.20@-7.736,11.385 v1(-7.736,12.677)
MISO_B2-: FPGA1.A3 U2.19 | length 8.2
  Top Layer w0.13: v1@-2.744,13.256 -2.288,12.8 FPGA1.A3@-2.288,12.242
  MidLayer1 w0.13: v1@-8.157,12.721 -7.653,13.225 v1(-2.7,13.225)
  Bottom Layer w0.13: U2.19@-8.145,11.4 v1(-8.145,12.689)
MOSI_A+: FPGA1.B10 U1.16 | length 14.8
  Top Layer w0.13: FPGA1.B10@1.212,11.742 v1(1.445,11.975)
  MidLayer1 w0.13: v1(1.445,11.975) 1.445,13.37 2.375,14.3 7.325,14.3 11.05,10.575 v1@11.05,9.525
  Bottom Layer w0.13: v1(11.075,9.5) 11.175,9.4 U1.16@11.575,9.4
MOSI_A-: FPGA1.A10 U1.15 | length 16.4
  Top Layer w0.13: FPGA1.A10@1.212,12.242 1.212,13.642 v1(2.195,14.625)
  MidLayer1 w0.13: v1(2.195,14.625) 7.425,14.625 12.325,9.725 v1(12.8,9.725)
  Bottom Layer w0.13: U1.15@11.65,9.8 U1.15@11.675,9.775 ; U1.15@11.873,9.801 12.624,9.801 12.7,9.725 v1@12.825,9.725
MOSI_B+: FPGA1.B5 U2.16 | length 11.9
  Top Layer w0.13: v1(-1.525,11.975) FPGA1.B5@-1.275,11.725
  MidLayer1 w0.13: v1@-9.419,12.76 -9.379,12.76 -8.039,14.1 -2.075,14.1 -1.525,13.55 v1(-1.525,11.975)
  Bottom Layer w0.13: U2.16@-9.427,11.388 v1@-9.427,12.677
  other v1: -9.411,12.713
MOSI_B-: FPGA1.A5 U2.15 | length 12.1
  Top Layer w0.13: v1@-1.75,14.275 -1.288,13.813 FPGA1.A5@-1.288,12.242
  MidLayer1 w0.13: v1@-9.798,12.778 -8.201,14.375 v1@-1.85,14.375
  Bottom Layer w0.13: U2.15@-9.804,11.432 v1@-9.804,12.721
  other v1: -9.814,12.738 -1.8,14.35
NetAMP1_1: AMP1.1 DAC1.6 | length 4.2
  Bottom Layer w0.13: DAC1.6@-0.983,0.29 -0.983,0.917 -0.725,1.175 0.225,1.175 1.45,-0.05 1.45,-0.525 AMP1.1@1.519,-0.594
NetAMP1_3: AMP1.3 C74.1 R41.1 R42.2 | length 4.1
  Bottom Layer w0.13: AMP1.3@2.519,-0.594 2.533,-0.58 R41.1@2.533,0.375 ; R41.1@2.658,0.375 3.258,0.375 C74.1@4.305,-0.671 ; R42.2@4.375,-1.7 C74.1@4.375,-0.668
NetAMP2_2: AMP2.2 R44.1 | length 1.3
  Bottom Layer w0.254: R44.1@2.95,-5.172 AMP2.2@4.204,-5.172
NetAMP2_3: AMP2.3 R44.2 | length 1.2
  Bottom Layer w0.254: R44.2@2.95,-4.672 AMP2.3@4.179,-4.672
NetC1_2: C1.2 C2.2 L5.1 L7.2 R10.1 | length 6.2
  Top Layer w0.13: C1.2@9.573,0.961 C1.2@9.779,1.168
  Top Layer w0.254: L7.2@8.052,2.22 8.902,2.22 ccw(c8.902,3.504) C2.2@9.81,2.596 C1.2@9.81,1.136 ; C1.2@9.573,0.961 ccw(c10.656,-0.122) R10.1@9.124,-0.122 L5.1@10.486,-0.122
NetC7_2: C7.2 C8.2 C9.2 L3.2 U9.10 | length 5.2
  Top Layer w0.254: U9.10@-8.848,-1.913 -8.6,-1.913 -8.331,-2.181 -8.331,-3.124 -7.996,-3.459 C8.2@-7.772,-3.459 C7.2@-7.772,-4.272 ; C9.2@-8.564,-4.358 -7.858,-4.358 C7.2@-7.772,-4.272 ; L3.2@-7.418,-5.379 -7.442,-5.355 -7.442,-4.602 C7.2@-7.772,-4.272
NetC15_2: C15.2 C16.2 C17.2 L4.1 U9.14 | length 6.6
  Top Layer w0.13: L4.1@-5.817,2.095 L4.1@-5.804,2.108
  Top Layer w0.254: U9.14@-8.848,0.087 -8.417,0.087 C16.2@-7.772,0.732 ; L4.1@-5.55,2.35 v1(-5.55,2.8)
  Bottom Layer w0.13: v1@-7.641,1.722 v1@-7.641,1.799
  Bottom Layer w0.254: v1@-7.641,1.722 -6.761,0.841 v1@-7.551,0.841 ; C17.2@-6.964,1.068 -6.285,1.068 -5.55,1.803 v1@-5.55,2.75
  other v1: -7.552,0.806 -7.648,1.791
NetC18_1: C18.1 J1.0 L6.1 R9.2 | length 16.5
  Top Layer w0.13: J1.0@0.122,-0.182 J1.0@0.127,-0.178 ; R9.2@8.041,-1.283 R9.2@8.11,-1.215
  Top Layer w0.508: C18.1@-6.872,-0.182 J1.0@0.122,-0.182 ; J1.0@0,0.065 2.093,0.065 cw(c2.093,-2.021) 3.569,-0.546 ccw(c3.887,-0.228) 3.887,-0.678 4.873,-0.678 ccw(c6.57,-0.678) 5.37,-1.878 ccw(c5.988,-1.26) 5.988,-2.134 ccw(c5.988,0.77) R9.2@8.041,-1.283
NetC18_2: C18.2 U9.13 | length 1.2
  Top Layer w0.254: U9.13@-8.848,-0.413 -8.286,-0.413 -8.056,-0.182 C18.2@-7.772,-0.182
NetC19_1: C19.1 R3.1 | length 1.1
  Top Layer w0.254: C19.1@-6.872,-1.021 R3.1@-5.783,-1.021
NetC19_2: C19.2 U9.12 | length 1.1
  Top Layer w0.254: U9.12@-8.848,-0.913 -7.88,-0.913 C19.2@-7.772,-1.021
NetC20_2: C20.2 R4.1 U9.9 | length 3
  Top Layer w0.254: C20.2@-10.317,-4.358 R4.1@-9.491,-4.358 -8.966,-3.832 -8.966,-2.421 U9.9@-8.975,-2.413
NetC48_1: C48.1 IMU1.10 | length 0.8
  Top Layer w0.13: IMU1.10@15.695,-5.611 16.225,-5.081 C48.1@16.225,-5.075
NetC52_2: C52.2 U8.E5 | length 3.2
  Top Layer w0.13: C52.2@10.071,-12.598 C52.2@10.173,-12.7
  Top Layer w0.508: U8.E5@7.036,-12.598 C52.2@10.071,-12.598
NetC53_2: C53.2 U8.A3 | length 2.4
  Top Layer w0.13: C53.2@3.324,-6.346 C53.2@3.324,-5.588
  Top Layer w0.381: C53.2@3.324,-6.346 U8.A3@4.496,-7.518
NetC57_2: C57.2 U7.4 | length 1
  Top Layer w0.13: C57.2@13.589,-0.965 C57.2@13.598,-0.974
  Top Layer w0.254: C57.2@13.598,-0.974 U7.4@14.547,-0.974
NetC65_1: C65.1 PWR15.6 R37.1 R38.2 | length 4.5
  Bottom Layer w0.13: R38.2@6.858,-15.225 7.275,-15.225 7.425,-15.375 8.525,-15.375 R37.1@8.825,-15.075 ; PWR15.6@8.45,-13.912 8.45,-14.6 R37.1@8.8,-14.95
  Bottom Layer w0.254: PWR15.6@8.45,-13.912 8.512,-13.85 C65.1@9.55,-13.85
NetC69_1: C69.1 D2.1 PWR15.5 | length 4.5
  Bottom Layer w0.13: PWR15.5@8.45,-11.087 8.587,-11.087
  Bottom Layer w0.254: 8.587,-11.087 9.85,-12.35 11.125,-12.35 D2.1@12.025,-13.25
NetC69_2: C69.2 L9.2 PWR15.4 | length 3.5
  Bottom Layer w0.13: L9.2@7.95,-9.675 L9.2@8,-9.625
  Bottom Layer w0.254: PWR15.4@7.95,-11.087 L9.2@7.95,-9.675 ; L9.2@8.128,-9.497 C69.2@9.553,-10.922
NetD1_2: D1.2 R18.2 | length 2.7
  Top Layer w0.203: D1.2@7.8,11.675 D1.2@8,11.675
  Top Layer w0.254: R18.2@5.967,10.25 6.692,10.975 7.25,10.975 D1.2@7.875,11.6
NetDAC1_1: DAC1.1 FPGA1.P8 | length 6.5
  Top Layer w0.13: v1(-0.025,5.975) FPGA1.P8@0.2,5.75
  MidLayer1 w0.13: v1@-0.25,1.675 -0.25,2.75 0.375,3.375 0.375,5.575 v1(-0.025,5.975)
  Bottom Layer w0.13: DAC1.1@-1.108,2.49 -1.108,2.058 -0.625,1.575 v1@-0.275,1.575
  other v1: -0.26,1.577
NetDAC1_2: DAC1.2 FPGA1.P4 LD3.2 | length 27.6
  Top Layer w0.13: LD3.2@-11.035,-10.613 -9.923,-10.613 -9.55,-10.986 v1@-5.093,-10.986 ; v1(-1.788,5.362) FPGA1.P4@-1.788,5.742
  MidLayer1 w0.13: v1@-5.067,-10.96 -5.067,-4.077 -3.85,-2.859 -3.85,3.305 v1@-1.793,5.362
  Bottom Layer w0.13: v1(-1.788,5.362) -1.788,4.388 -0.458,3.058 DAC1.2@-0.458,2.49
  other v1: -5.093,-10.973
NetDAC1_3: DAC1.3 FPGA1.N4 LD3.3 | length 28.5
  Top Layer w0.13: LD3.3@-11.035,-10.113 -9.851,-10.113 -9.264,-10.7 -6.001,-10.7 v1@-5.779,-10.477 ; v1(-2.025,6) -1.8,6.225 FPGA1.N4@-1.8,6.25 ; FPGA1.N4@-1.786,6.239 FPGA1.N4@-1.775,6.25
  MidLayer1 w0.13: v1@-5.779,-10.452 -5.359,-10.033 -5.359,-3.95 -4.175,-2.765 -4.175,3.4 -2.03,5.545 -2.03,5.995 v1(-2.025,6)
  Bottom Layer w0.13: v1(-2.025,6) -1.675,5.65 -1.475,5.65 -1,5.175 -1,4.05 0.192,2.858 DAC1.3@0.192,2.49
  other v1: -5.779,-10.49
NetFPGA1_B2: FPGA1.B2 R11.1 R12.2 | length 5
  Top Layer w0.13: R11.1@-6.725,14.033 -6.725,13.925 R12.2@-5.975,13.175 ; v1(-5.874,12.52) -5.874,12.971 R12.2@-5.873,12.972 ; v1@-3.025,11.978 FPGA1.B2@-2.788,11.742
  MidLayer1 w0.13: v1@-5.872,12.522 -5.65,12.3 -3.325,12.3 v1(-3.025,12)
NetFPGA1_M12: FPGA1.M12 R35.2 | length 4.8
  Top Layer w0.13: FPGA1.M12@2.212,6.742 v1@2.42,6.95
  MidLayer1 w0.13: v1(2.45,6.975) 3,6.975 3.375,6.6 3.375,5.15 v1@3.363,5.138
  Bottom Layer w0.13: R35.2@3.325,3.15 3.375,3.2 v1(3.375,5.125)
NetFPGA1_N8: FPGA1.N8 PWR15.8 PWR15.9 R39.2 | length 31
  Top Layer w0.13: FPGA1.N8@0.212,6.242 v1@0.428,6.025 ; v1@0.475,6.025 v1@0.5,6.025
  MidLayer1 w0.13: v1(0.475,6) 0.625,5.85 0.625,0.075 6.525,-5.825 8.375,-5.825 10.825,-8.275 10.825,-12.1 8.5,-14.425 v1@7.475,-14.425
  Bottom Layer w0.13: PWR15.9@6.925,-14.075 PWR15.9@6.95,-14.1 ; PWR15.8@7.362,-13.912 PWR15.8@7.375,-13.925 ; PWR15.8@7.45,-13.925 7.45,-14.325 v1@7.55,-14.425
  Bottom Layer w0.254: R39.2@5.575,-14.933 5.883,-14.625 6.775,-14.625 6.95,-14.45 PWR15.9@6.95,-14.1 ; PWR15.9@6.95,-13.912 PWR15.8@7.362,-13.912
  other v1: 7.575,-14.475
NetFPGA1_N11: FPGA1.N11 R13.2 | length 25.5
  Top Layer w0.13: FPGA1.N11@1.712,6.242 v1@1.95,6.003 ; v1@4.475,3.7 4.526,3.649 8.024,3.649 9.3,4.925 v1@12.725,4.925 ; R13.2@13.425,-3.092 13.942,-3.092 v1@15.325,-4.475
  MidLayer1 w0.13: v1(1.95,6) 4.275,3.675 v1(4.475,3.675) ; v1@12.763,4.925 12.763,-1.939 v1@15.3,-4.475
  other v1: 15.3,-4.5 12.775,4.95
NetFPGA1_P9: FPGA1.P9 R46.2 SW1.6 | length 25.3
  Top Layer w0.13: FPGA1.P9@0.712,5.742 0.712,5.738 v1@0.925,5.525
  MidLayer1 w0.13: v1(0.95,5.475) 0.95,4.425 11.95,-6.575 11.95,-8.75 v1(12.425,-9.225)
  Bottom Layer w0.13: SW1.6@11.924,-5.8 13.35,-5.8 13.65,-6.1 13.65,-7.65 12.55,-8.75 R46.2@12.475,-8.75 ; R46.2@12.425,-8.833 R46.2@12.475,-8.783
  Bottom Layer w0.254: v1(12.425,-9.225) R46.2@12.425,-8.833
NetL2_1: L2.1 U10.2 | length 2
  Top Layer w0.13: L2.1@-4.204,-7.899 L2.1@-4.174,-7.899
  Top Layer w0.254: L2.1@-4.174,-7.899 -3.221,-6.946 U10.2@-3.221,-6.299
NetL6_2: L6.2 L7.1 R9.1 R10.2 | length 5.5
  Top Layer w0.13: L6.2@6.631,-0.5 7.241,-0.5
  Top Layer w0.254: R10.2@8.122,-0.135 8.874,-0.886 cw(c8.546,-1.215) R9.1@9.01,-1.215
  Top Layer w0.508: L7.1@5.5,1.675 cw(c3.227,-0.598) L6.2@6.441,-0.598 ; 7.241,-0.5 ccw(c7.241,0.747) R10.2@8.122,-0.135
NetL8_2: L8.2 PWR15.2 | length 3.1
  Bottom Layer w0.254: L8.2@4.534,-9.516 5.269,-10.25 6.6,-10.25 6.95,-10.6 PWR15.2@6.95,-10.875
NetLD1_23: LD1.23 R33.2 | length 18.3
  Top Layer w0.13: R33.2@-10.782,-14.11 -10.757,-14.135 v1(-10.757,-14.63) ; LD1.23@4.475,-14.15 v1(4.475,-13.698)
  MidLayer1 w0.13: v1@-10.745,-14.63 -9.35,-16.025 -5.001,-16.025 -4.054,-15.078 4.097,-15.078 4.475,-14.7 v1@4.475,-13.75
  Bottom Layer w0.13: v1@-10.77,-14.63 v1@-10.763,-14.637 ; v1(-10.757,-14.63) v1@-10.745,-14.63
NetLD2_23: LD2.23 R34.2 | length 7.2
  Top Layer w0.13: v1@-6.668,-16.281 LD2.23@-6.668,-15.21 ; LD2.23@-6.667,-15.253 LD2.23@-6.617,-15.202
  MidLayer1 w0.13: v1@-11.506,-14.503 -9.703,-16.307 -6.667,-16.307 -6.65,-16.289 -6.65,-16.325 v1(-6.675,-16.35)
  Bottom Layer w0.13: R34.2@-11.55,-14.1 -11.506,-14.144 v1@-11.506,-14.503
  other v1: -11.507,-14.53
NetLD3_12: LD3.12 R34.1 | length 3.9
  Top Layer w0.13: LD3.12@-14.035,-11.113 -14.035,-12.09 -13.15,-12.975 v1@-12.2,-12.975
  Bottom Layer w0.13: v1@-12.2,-13 -11.975,-13.225 R34.1@-11.533,-13.225
  other v1: -12.204,-12.986
NetLD3_15: LD3.15 R33.1 | length 2.7
  Top Layer w0.13: LD3.15@-12.285,-12.239 LD3.15@-12.285,-11.863 ; LD3.15@-12.281,-11.811 -12.281,-12.217 -11.836,-12.662 -11.378,-12.662 R33.1@-10.812,-13.228
NetPWR15_7: PWR15.7 R37.2 | length 1.2
  Bottom Layer w0.13: R37.2@7.95,-15.125 PWR15.7@7.95,-13.912
NetPWR15_10: PWR15.10 R36.2 R40.1 | length 8
  Bottom Layer w0.13: R40.1@3.645,-10.462 4.05,-10.867 4.05,-13.775 4.6,-14.325 5.45,-14.325 ; R36.2@4.675,-15.842 5.125,-15.392 5.125,-14.65 5.675,-14.1 PWR15.10@6.45,-14.1
NetR5_1: R5.1 R6.2 U9.8 | length 5.1
  Top Layer w0.152: R6.2@-10.854,-6.611 -10.854,-4.92 -11.194,-4.579 R5.1@-11.396,-4.579 -11.396,-4.412 -10.744,-3.759 -9.855,-3.759 -9.625,-3.529 U9.8@-9.625,-3.063
NetR18_1: R18.1 T1.3 | length 1.3
  Top Layer w0.13: R18.1@5.925,9.375 R18.1@6.016,9.284
  Top Layer w0.254: R18.1@6.016,9.284 T1.3@7.214,9.284
NetR23_2: R23.2 U6.2 | length 1.3
  Bottom Layer w0.254: U6.2@14.612,4.5 R23.2@14.612,5.75
NetR28_1: R28.1 R29.2 U7.8 | length 4.7
  Top Layer w0.13: R29.2@17.297,-3.264 18.111,-3.264 19.025,-2.35 19.025,-1.791 18.721,-1.487 U7.8@18.321,-1.487 ; R29.2@17.42,-3.294 R29.2@17.265,-3.294 17.265,-3.828 R28.1@17.648,-4.211
NetR29_1: R29.1 U7.9 | length 4.5
  Top Layer w0.13: R29.1@16.365,-3.294 v1(17.084,-2.575) v1@17.1,-2.575 ; U7.9@18.347,-0.974 18.373,-1 19.025,-1 19.075,-1.05 19.05,-1.05 v1(19.05,-1.025)
  MidLayer1 w0.13: v1(17.084,-2.575) 18.609,-1.05 v1@19.05,-1.05 ; v1(19.05,-1.025) v1@19.05,-1.05 ; v1@19.075,-1.05 v1@19.05,-1.05
NetR30_1: R30.1 U8.C4 | length 3
  Top Layer w0.13: R30.1@8.357,-10.693 R30.1@8.433,-10.77
  Top Layer w0.254: U8.C4@5.766,-10.058 6.401,-10.693 R30.1@8.357,-10.693
NetR31_1: R31.1 U8.A4 | length 2.7
  Top Layer w0.254: U8.A4@5.766,-7.518 6.477,-6.807 7.468,-6.807 R31.1@7.95,-6.325
NetR32_1: R32.1 U8.E4 | length 9.3
  Top Layer w0.254: U8.E4@5.766,-12.598 6.867,-13.7 10.625,-13.7 11.625,-12.7 11.625,-11.275 v1(12.083,-10.817)
  Bottom Layer w0.254: v1(12.083,-10.817) R32.1@12.083,-10.304
NetR45_1: R45.1 SW1.8 | length 1.1
  Bottom Layer w0.13: SW1.8@12,-6.775 SW1.8@12.025,-6.8
  Bottom Layer w0.254: SW1.8@12.025,-6.8 12.025,-7.742 R45.1@12.1,-7.817
PCLK: FPGA1.J1 U9.3 | length 15.8
  Top Layer w0.13: v1(-12.128,-2.54) -12.128,-3.059 U9.3@-12.125,-3.063 ; v1(-9.45,3.425) -4.633,8.242 FPGA1.J1@-3.288,8.242
  MidLayer1 w0.13: v1@-12.122,-2.546 -10.287,-0.711 -10.287,2.588 v1(-9.45,3.425)
  Bottom Layer w0.13: v1@-12.167,-2.578 v1@-12.154,-2.578
S_CLOCK: Flash1.6 FPGA1.N13 R16.1 R17.2 | length 23.4
  Top Layer w0.13: FPGA1.N13@2.712,6.242 2.717,6.242 v1@2.975,6.5 ; v1(4.625,6.55) 5.425,7.35 11.002,7.35 R17.2@11.525,6.828 ; R16.1@12.534,6.769 R16.1@12.593,6.828
  Top Layer w0.254: R17.2@11.583,6.769 v1(12.052,6.769) R16.1@12.534,6.769
  MidLayer1 w0.13: v1@12.065,6.756 12.408,6.756 13.246,5.919 13.246,3.279 16.2,0.325 v1(19.075,0.325)
  Bottom Layer w0.13: v1@3,6.5 v1@4.6,6.5 ; Flash1.6@18.075,-1 19.075,0 v1(19.075,0.325)
  other v1: 2.95,6.5
S_DATA_IN: Flash1.5 FPGA1.P11 | length 22.7
  Top Layer w0.13: FPGA1.P11@1.712,5.742 1.712,5.738 2.9,4.55 8.063,4.55 9.139,5.626 v1@13.576,5.626
  MidLayer1 w0.13: v1(13.589,5.613) 13.589,3.511 16.3,0.8 v1(19.075,0.8)
  Bottom Layer w0.13: Flash1.5@18.125,0.125 18.8,0.8 v1(19.075,0.8)
S_DATA_OUT: Flash1.2 R13.1 | length 2.8
  Top Layer w0.13: v1(11.175,-2.175) 11.608,-2.175 R13.1@12.525,-3.092
  Bottom Layer w0.13: Flash1.2@10.1,-2.225 10.15,-2.175 v1(11.175,-2.175)